# EAGLE board h_bridge2 (EAGLE 4.16)
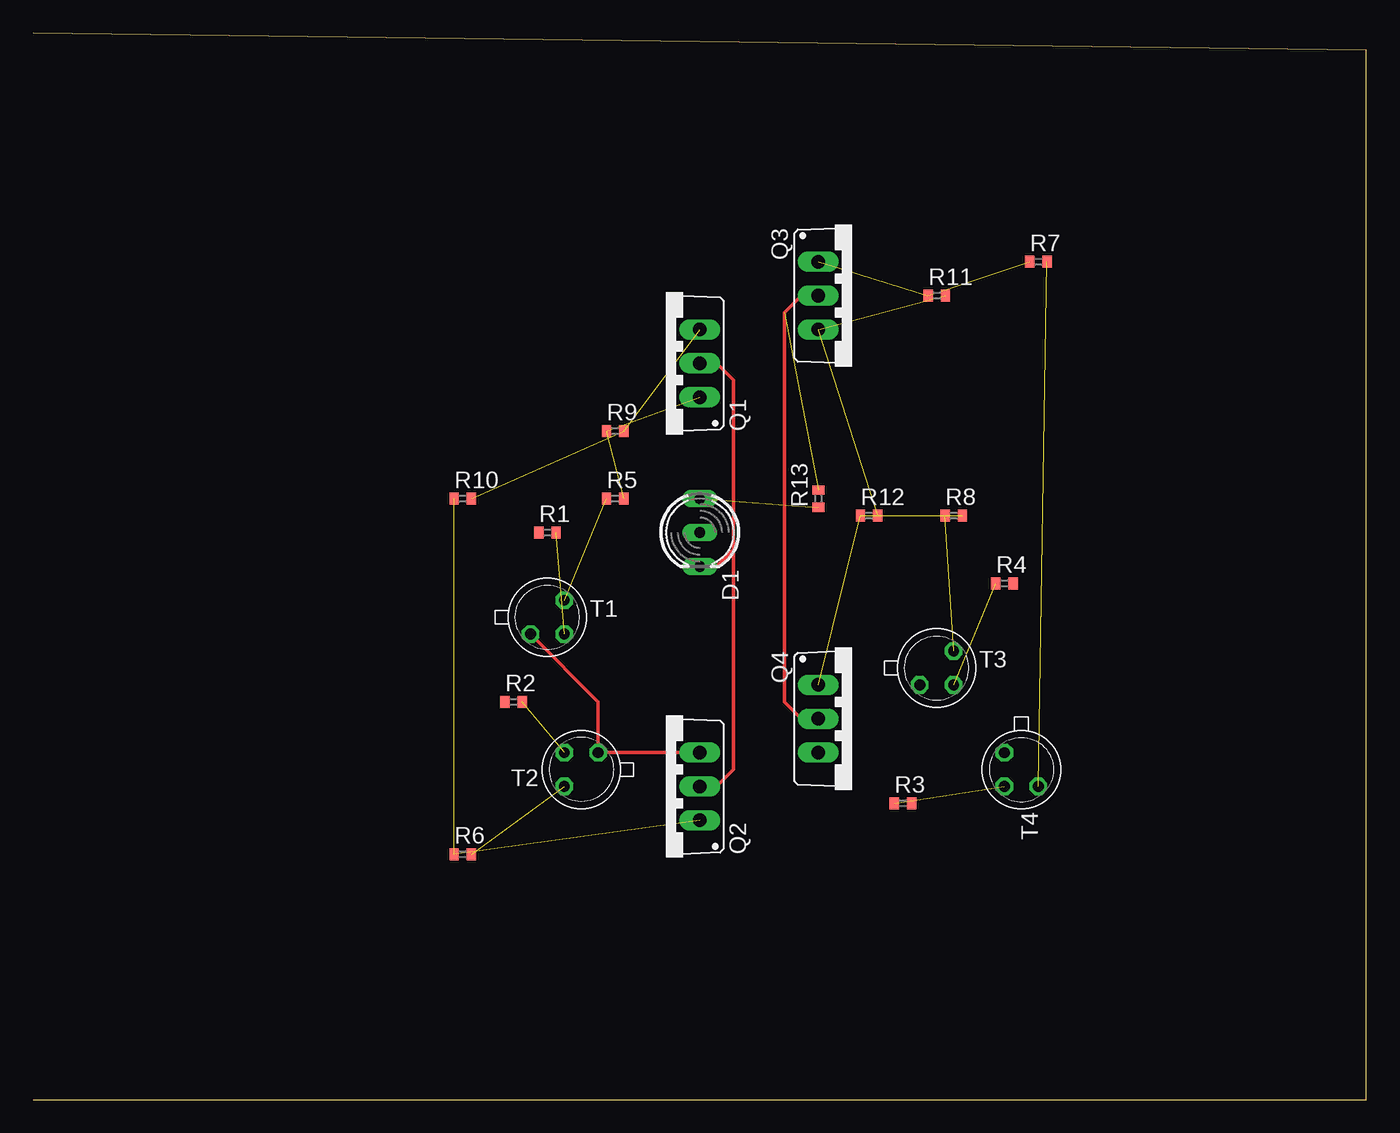
[diagram p0: board, top side]
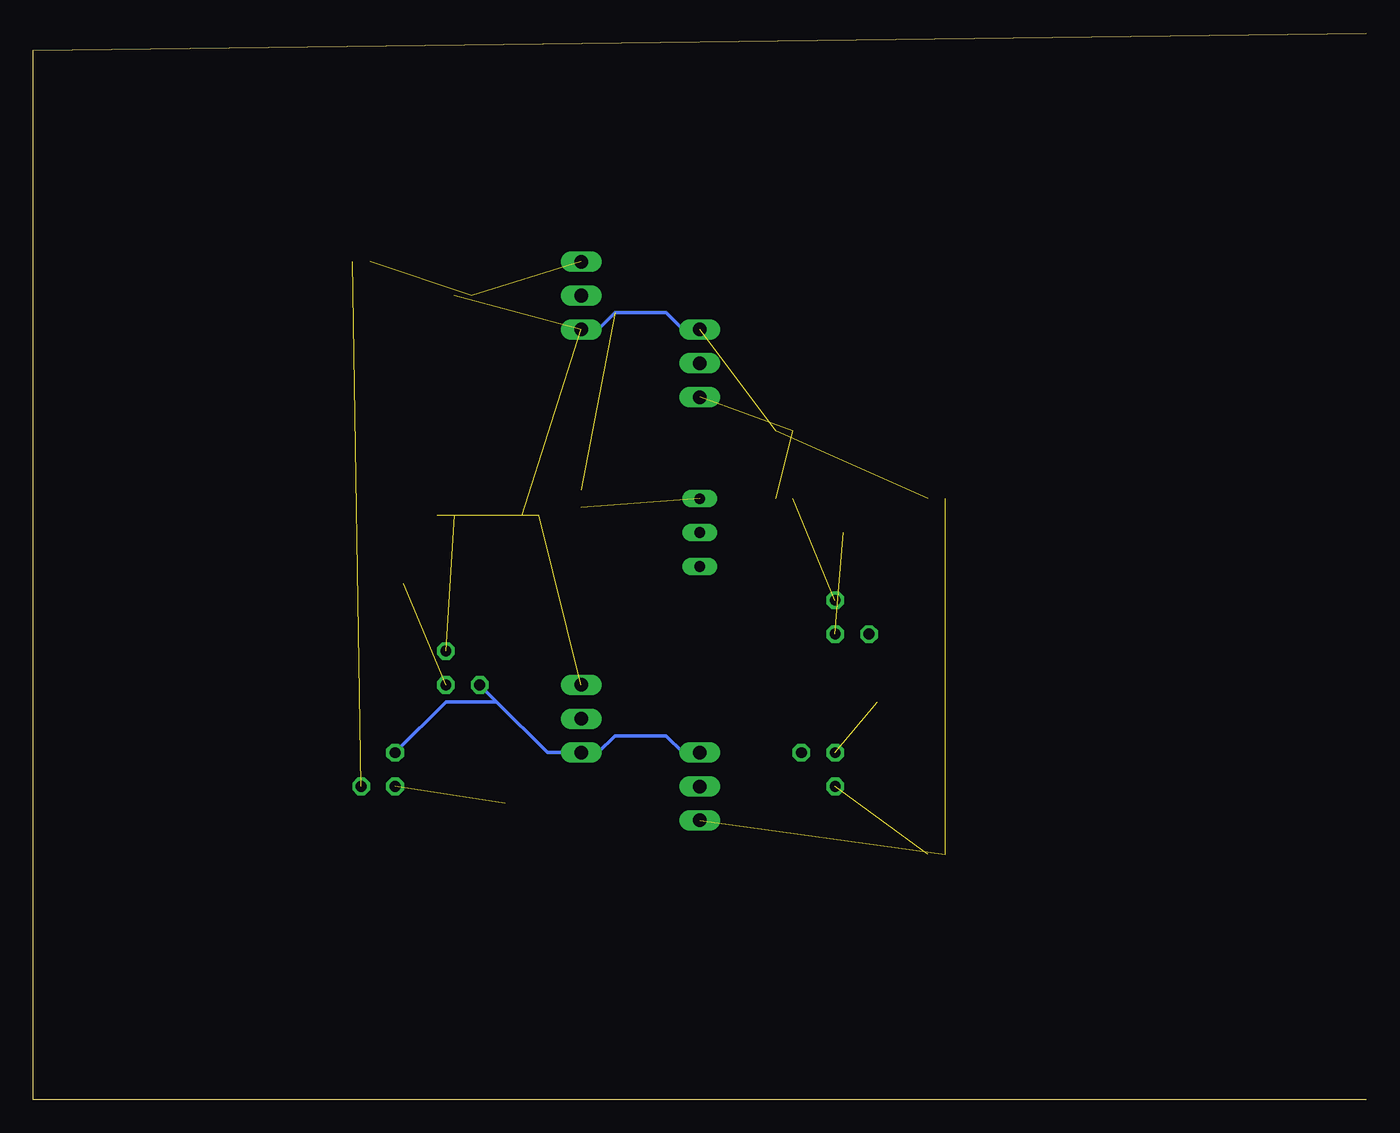
[diagram p1: board, bottom side, seen from below]

Size 100 x 80 mm. Coordinates in mm from the lower left corner, seen from the top.
Outline: 0,0 100,0 100,78.73 0,80
Copper layers (1*16): Top 0.035mm / dielectric 1.5mm / Bottom 0.035mm
Design rules "default": minimum track width 10mil, minimum drill 24mil, track to track 8mil, track to pad 8mil, pad to pad 8mil, via to via 8mil, smd to smd 8mil, copper to edge 40mil, drill to drill 8mil, minimum pad ring 10mil, minimum via ring 8mil, stop-mask expansion 4mil, vias tented up to drill 0mil, thermal gap 10mil

## Footprints (pad centres in the part's own frame; a part is rotated, then mirrored left to right if it is on the bottom)
DUOLED5MM = drill 0.813 long: AG -2.54,0; AR 2.54,0; K 0,0
TO220BV = drill 1.016 long: D 0,-2.54; G -2.54,-2.54; S 2.54,-2.54
R0402 = smd 0.7 x 0.9: 1 -0.65,0; 2 0.65,0
TO18 = drill 0.813 octagon: 1 -1.27,-1.27; 2 1.27,-1.27; 3 1.27,1.27

## Placement (x,y rotation side)
D1  [DUOLED5MM]  50,42.54 270 top
Q1  IRF9530  [TO220BV]  47.46,55.24 90 top
Q2  IRF740  [TO220BV]  47.46,23.49 90 top
Q3  IRF9530  [TO220BV]  61.43,60.32 270 top
Q4  IRF740  [TO220BV]  61.43,28.57 270 top
R1  22k  [R0402]  38.57,42.54 0 top
R2  22k  [R0402]  36.03,29.84 0 top
R3  22k  [R0402]  65.24,22.22 0 top
R4  22k  [R0402]  72.86,38.73 0 top
R5  100  [R0402]  43.65,45.08 0 top
R6  100  [R0402]  32.22,18.41 0 top
R7  100  [R0402]  75.4,62.86 0 top
R8  100  [R0402]  69.05,43.81 0 top
R9  10k  [R0402]  43.65,50.16 0 top
R10  10k  [R0402]  32.22,45.08 0 top
R11  10k  [R0402]  67.78,60.32 0 top
R12  10k  [R0402]  62.7,43.81 0 top
R13  [R0402]  58.89,45.08 90 top
T1  2N2222  [TO18]  38.57,36.19 0 top
T2  2N2222  [TO18]  41.11,24.76 180 top
T3  2N2222  [TO18]  67.78,32.38 0 top
T4  2N2222  [TO18]  74.13,24.76 270 top

## Library data of the parts
D1 = led
Q1-Q4 = transistor-power
R1-R13 = quantum-sensor
T1-T4 = transistor

## Nets
+12V: Q1.S Q3.S R9.2 R10.2 R11.2 R12.2
GND: Q2.S Q4.S T1.1 T2.1 T3.1 T4.1
N$1: R1.2 T1.2
N$2: R5.1 T1.3
N$4: Q3.G R7.1 R11.1
N$6: Q1.G R5.2 R9.1
N$7: R7.2 T4.3
N$8: R3.1 T4.2
N$9: R4.1 T3.2
N$10: R8.1 T3.3
N$11: Q4.G R8.2 R12.1
N$12: Q3.D Q4.D R13.2
N$13: D1.AR Q1.D Q2.D
N$14: Q2.G R6.1 R10.1
N$16: R6.2 T2.3
N$17: R2.2 T2.2
N$18: D1.AG R13.1

## Tracks (layer width: path | path; a pad name or v marks a point on that pad's centre or on a via)
+12V  (4 unrouted)
  Bottom 0.254: Q1.S 51.27,57.78 52.54,59.05 56.35,59.05 57.62,57.78 Q3.S
GND
  Top 0.254: Q2.S T2.1 42.38,29.84 T1.1
  Bottom 0.254: 65.24,29.84 61.43,26.03 Q4.S 57.62,26.03 56.35,27.3 52.54,27.3 51.27,26.03 Q2.S | 65.24,29.84 T3.1 | T4.1 69.05,29.84 65.24,29.84
N$1  (1 unrouted)
N$2  (1 unrouted)
N$4  (2 unrouted)
N$6  (2 unrouted)
N$7  (1 unrouted)
N$8  (1 unrouted)
N$9  (1 unrouted)
N$10  (1 unrouted)
N$11  (2 unrouted)
N$12  (1 unrouted)
  Top 0.254: Q4.D 57.62,28.57 56.35,29.84 56.35,59.05 57.62,60.32 Q3.D
N$13
  Top 0.254: 52.54,41.27 51.27,40 D1.AR | 52.54,41.27 52.54,53.97 51.27,55.24 Q1.D | 52.54,41.27 52.54,24.76 51.27,23.49 Q2.D
N$14  (2 unrouted)
N$16  (1 unrouted)
N$17  (1 unrouted)
N$18  (1 unrouted)